# EAGLE board longranger-001 (EAGLE 8.7.0)
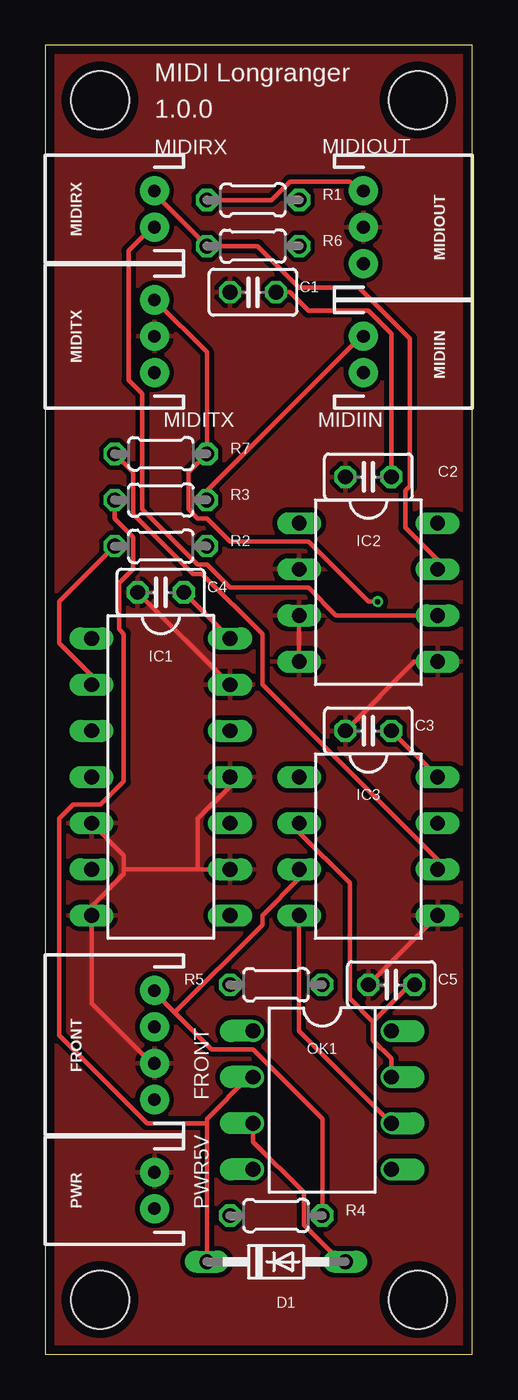
[diagram p0: board, top side]
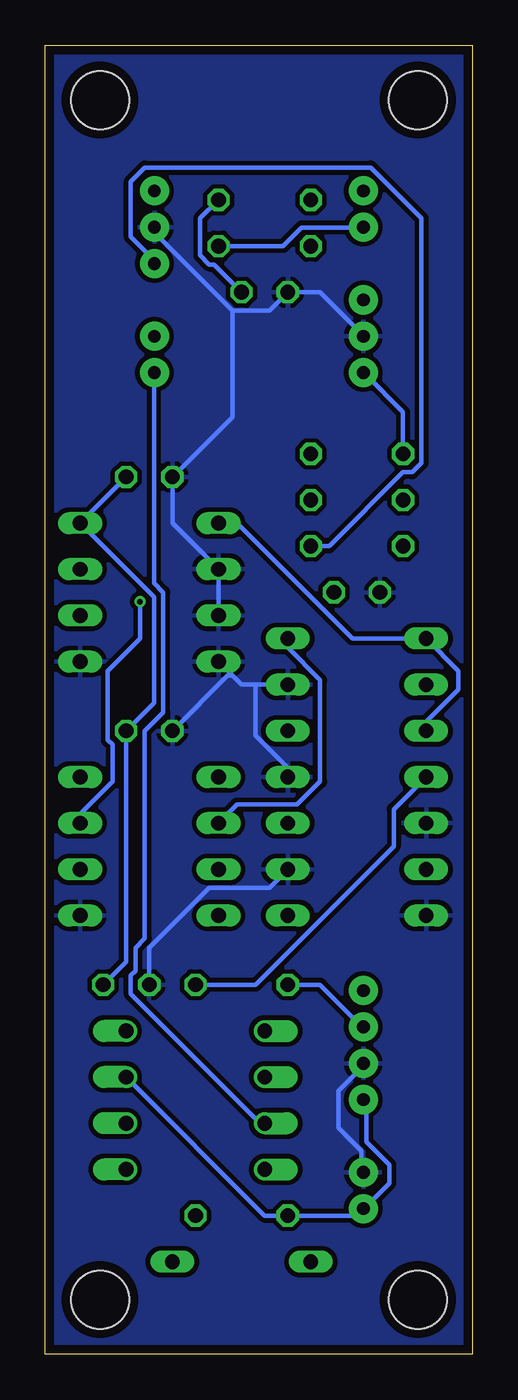
[diagram p1: board, bottom side, seen from below]

Size 23.5 x 72 mm. Coordinates in mm from the lower left corner, seen from the top.
Outline: 0,0 23.5,0 23.5,72 0,72 0,0
Copper layers (1*16): Top 0.035mm / dielectric 1.53mm / Bottom 0.035mm
Design rules "pban_5mil-l2 *": minimum track width 5mil, minimum drill 0.3mm, track to track 10mil, track to pad 10mil, pad to pad 10mil, via to via 10mil, smd to smd 5mil, copper to edge 0.5mm, drill to drill 0.5mm, minimum pad ring 0.15mm, minimum via ring 0.15mm, stop-mask expansion 4mil, vias tented up to drill 0.35mm, thermal gap 10mil
Net classes: 0 default: width 0.254 mm, drill 0.254 mm, clearance 0.254 mm
Holes 3.2 mm at 3,3 20.5,3 20.5,69 3,69

## Footprints (pad centres in the part's own frame; a part is rotated, then mirrored left to right if it is on the bottom)
C025-025X050 = drill 0.813 octagon: 1 -1.27,0; 2 1.27,0
DO34-7 = drill 0.813 long: A 3.81,0; C -3.81,0
JST-4-PTH = drill 0.7 pad 1.6: 1 -3,0; 2 -1,0; 3 1,0; 4 3,0
DIL14 = drill 0.813 long: 1 -7.62,-3.81; 2 -5.08,-3.81; 3 -2.54,-3.81; 4 0,-3.81; 5 2.54,-3.81; 6 5.08,-3.81; 7 7.62,-3.81; 8 7.62,3.81; 9 5.08,3.81; 10 2.54,3.81; 11 0,3.81; 12 -2.54,3.81; 13 -5.08,3.81; 14 -7.62,3.81
DIL08 = drill 0.813 long: 1 -3.81,-3.81; 2 -1.27,-3.81; 3 1.27,-3.81; 4 3.81,-3.81; 5 3.81,3.81; 6 1.27,3.81; 7 -1.27,3.81; 8 -3.81,3.81
JST-2-PTH = drill 0.7 pad 1.6: 1 -1,0; 2 1,0
JST-3-PTH = drill 0.7 pad 1.6: 1 -2,0; 2 0,0; 3 2,0
DIL08' = drill 0.813 offset: 1 -3.81,-3.81; 2 -1.27,-3.81; 3 1.27,-3.81; 4 3.81,-3.81; 5 3.81,3.81; 6 1.27,3.81; 7 -1.27,3.81; 8 -3.81,3.81
0204/5 = drill 0.813 octagon: 1 -2.54,0; 2 2.54,0

## Placement (x,y rotation side)
C1  104  [C025-025X050]  11.43,58.42 180 top
C2  103  [C025-025X050]  17.78,48.26 180 top
C3  103  [C025-025X050]  17.78,34.29 180 top
C4  103  [C025-025X050]  6.35,41.91 180 top
C5  103  [C025-025X050]  19.05,20.32 180 top
D1  BAS15  [DO34-7]  12.7,5.08 0 top
FRONT  [JST-4-PTH]  6,17 90 top
IC1  74LS07N  [DIL14]  6.35,31.75 270 top
IC2  LTC485N  [DIL08]  17.78,41.91 270 top
IC3  LTC485N  [DIL08]  17.78,27.94 270 top
MIDIIN  [JST-2-PTH]  17.5,55 270 top
MIDIOUT  [JST-3-PTH]  17.5,62 270 top
MIDIRX  [JST-2-PTH]  6,63 90 top
MIDITX  [JST-3-PTH]  6,56 90 top
OK1  6N137  [DIL08']  15.24,13.97 270 top
PWR  [JST-2-PTH]  6,9 90 top
R1  220  [0204/5]  11.43,63.5 0 top
R2  220  [0204/5]  6.35,44.45 0 top
R3  220  [0204/5]  6.35,46.99 0 top
R4  10k  [0204/5]  12.7,7.62 0 top
R5  330  [0204/5]  12.7,20.32 0 top
R6  120  [0204/5]  11.43,60.96 0 top
R7  120  [0204/5]  6.35,49.53 180 top

## Library data of the parts
C1-C5 = rcl; SPICEPREFIX: C
D1 = diode
FRONT = SparkFun-Connectors; PROD_ID: WIRE-13531; SF_ID: PRT-09916
IC1 = 74xx-us
IC2 IC3 = linear-technology; OC_FARNELL: unknown; OC_NEWARK: unknown
MIDIIN MIDIRX PWR = SparkFun-Connectors; PROD_ID: CONN-09863; SKU: PRT-09914
MIDIOUT MIDITX = SparkFun-Connectors; PROD_ID: WIRE-10037; SF_ID: PRT-09915
OK1 = optocoupler; MPN: 6N137; OC_FARNELL: 1328376; OC_NEWARK: 52M1895
R1-R7 = resistor

## Nets
COM1: IC1.1 IC1.3 IC2.1
COM2: IC3.4 OK1.6
GND: C1.2 C2.2 C3.2 C4.2 C5.2 FRONT.2 IC1.5 IC1.7 IC1.9 IC1.11 IC1.13 IC2.2 IC2.3 IC2.4 IC2.5 IC3.5 MIDIOUT.2 MIDITX.2 PWR.2
INDICATOR: FRONT.3 R5.1
MIDIRX+: MIDIIN.1 R3.2
MIDIRX-: D1.A MIDIIN.2 OK1.3
MIDITX+: MIDIOUT.1 R1.1
MIDITX-: MIDIOUT.3 R2.2
MUTE: FRONT.4 IC3.3 R4.2
N$2: IC1.2 R2.1
N$3: IC1.4 R5.2
N$15: D1.C OK1.2 R3.1
RX+: IC2.6 MIDIRX.1 R6.2
RX-: IC2.7 MIDIRX.2 R6.1
TX+: IC3.6 MIDITX.1 R7.2
TX-: IC3.7 MIDITX.3 R7.1
VCC: C1.1 C2.1 C3.1 C4.1 C5.1 FRONT.1 IC1.14 IC2.8 IC3.2 IC3.8 OK1.7 PWR.1 R1.2 R4.1

## Tracks (layer width: path | path; a pad name or v marks a point on that pad's centre or on a via)
COM1
  Bottom 0.254: IC1.3 2.54,34.8 0.76,36.58 0.76,37.59 IC1.1 6.6,39.37 12.95,45.72 IC2.1
COM2
  Top 0.254: IC3.4 13.97,17.78 OK1.6
GND
  Top 0.254: IC3.5 C5.2 | 4.32,26.67 4.32,27.43 IC1.5 | 4.32,26.67 4.32,26.42 2.54,24.64 IC1.7 2.54,19.3 5.84,16 FRONT.2 | 4.32,26.67 8.38,26.67 | 8.38,26.67 IC1.9 | IC1.11 10.16,31.24 8.38,29.46 8.38,26.67 | IC1.13 C4.2 | IC2.4 IC2.3 | IC2.5 20.32,38.1 C3.2
  Bottom 0.254: PWR.2 6.1,10.16 6.1,11.18 7.37,12.45 7.37,14.48 6.1,15.75 FRONT.2 | C5.2 17.78,22.35 14.48,25.65 11.18,25.65 IC1.9 | MIDITX.2 6.1,56.13 8.38,58.42 C1.2 11.18,57.4 13.21,57.4 | 13.21,57.4 17.27,61.47 17.27,61.98 MIDIOUT.2 | 11.94,36.83 12.7,36.83 13.21,37.34 | 11.94,36.83 IC1.13 | IC2.4 13.21,37.34 | C3.2 13.46,37.34 13.21,37.34 | IC2.3 IC2.2 16.51,45.72 C2.2 13.21,51.56 13.21,57.4 | IC1.11 10.16,32.26 11.94,34.04 11.94,36.83
  pour Top (isolate 0.254): 0,0 23.5,0 23.5,72 0.5,72 0,72
  pour Bottom (isolate 0.254): 0,0 23.5,0 23.5,72 0,72
INDICATOR
  Bottom 0.254: R5.1 8.38,20.32 6.1,18.03 FRONT.3
MIDIRX+
  Top 0.254: R3.2 8.89,47.5 17.27,55.88 MIDIIN.1
MIDIRX-
  Top 0.254: OK1.3 11.43,11.68 14.22,8.89 14.22,7.11 16.26,5.08 D1.A
  Bottom 0.254: OK1.3 11.68,12.7 18.8,19.81 18.8,20.83 18.54,21.08 18.54,22.35 18.03,22.86 18.03,34.29 17.02,35.31 17.02,41.91 17.53,42.42 17.53,53.85 MIDIIN.2
MIDITX+
  Top 0.254: R1.1 12.45,63.5 13.46,64.52 16.76,64.52 17.27,64.01 MIDIOUT.1
MIDITX-
  Bottom 0.254: R2.2 7.87,44.45 3.81,48.51 3.3,48.51 2.79,49.02 2.79,62.48 5.59,65.28 18.03,65.28 18.8,64.52 18.8,61.47 17.53,60.2 MIDIOUT.3
MUTE
  Top 0.254: R4.2 15.24,12.95 11.43,16.76 9.14,16.76 7.11,18.8 | 7.11,18.8 6.1,19.81 FRONT.4 | IC3.3 13.97,26.16 11.94,24.13 11.94,23.62 7.11,18.8
N$2
  Top 0.254: IC1.2 2.54,37.34 0.76,39.12 0.76,41.4 R2.1
N$3
  Bottom 0.254: R5.2 11.94,20.32 4.32,27.94 4.32,29.97 IC1.4
N$15
  Top 0.254: 8.89,12.7 8.89,12.95 11.18,15.24 OK1.2 | 8.89,12.7 D1.C | R3.1 3.81,45.97 4.83,44.96 4.83,43.18 4.06,42.42 4.06,39.88 4.32,39.62 4.32,31.5 3.05,30.23 1.52,30.23 0.76,29.46 0.76,17.53 5.59,12.7 8.89,12.7
RX+
  Top 0.254: IC2.6 16,40.64 14.48,42.16 10.16,42.16 8.89,43.43 8.38,43.43 5.33,46.48 5.33,52.83 4.57,53.59 4.57,60.71 5.84,61.98 MIDIRX.1
  Bottom 0.254: R6.2 10.41,60.96 9.4,61.98 6.1,61.98 MIDIRX.1
RX-
  Top 0.254: MIDIRX.2 6.1,63.75 R6.1 11.68,60.96 13.97,58.67 17.27,58.67 20.07,55.88 20.07,47.75 19.81,47.5 19.81,45.47 21.59,43.69 IC2.7
TX+
  Top 0.254: IC3.6 21.59,27.18 11.94,36.83 11.94,39.62 8.64,42.93 8.13,42.93 4.83,46.23 4.83,48.51 R7.2
  Bottom 0.254: R7.2 3.81,51.82 5.84,53.85 MIDITX.1
TX-  (via drill 0.3)
  Top 0.254: MIDITX.3 6.1,57.91 8.89,55.12 R7.1 7.87,48.51 7.87,46.48 8.38,45.97 8.89,45.97 10.16,44.7 14.48,44.7 17.78,41.4 v18.29,41.4
  Bottom 0.254: IC3.7 21.59,29.72 19.81,31.5 19.81,33.53 20.07,33.78 20.07,37.59 18.29,39.37 v18.29,41.4
VCC
  Top 0.254: C4.1 IC1.14 | IC3.8 C3.1 | OK1.7 19.05,16.26 18.03,17.27 18.03,18.29 | 18.03,18.29 20.07,20.32 C5.1 | IC3.2 13.97,28.7 16.76,25.91 16.76,19.56 18.03,18.29 | C1.1 13.46,58.42 14.48,57.4 17.78,57.4 19.05,56.13 C2.1
  Bottom 0.254: FRONT.1 5.84,13.97 5.84,11.68 4.57,10.41 4.57,9.4 5.84,8.13 PWR.1 6.1,7.87 6.35,7.62 R4.1 11.43,7.62 OK1.7 | C1.1 14.22,59.94 14.48,59.94 14.99,60.45 14.99,62.48 R1.2 | C2.1 IC2.8 17.53,41.66 17.53,35.81 C3.1 19.05,21.59 C5.1 | IC1.14 10.16,38.86 8.38,37.08 8.38,31.5 9.65,30.23 12.95,30.23 IC3.2

## Text on the board
tNames: MIDI Longranger | 1.0.0 | MIDIRX | MIDIOUT | MIDITX | MIDIIN | FRONT | PWR5V